# Altium PCB Cam_control.PcbDoc
Units mm, origin at the board's own origin, x right, y up, seen from the top; angles counter-clockwise.
Board outline 27 x 48 mm, 2 copper layers (Top Layer, Bottom Layer), stack 1.571 mm thick; 53 components, 45 nets, 197 pads, 35 vias.
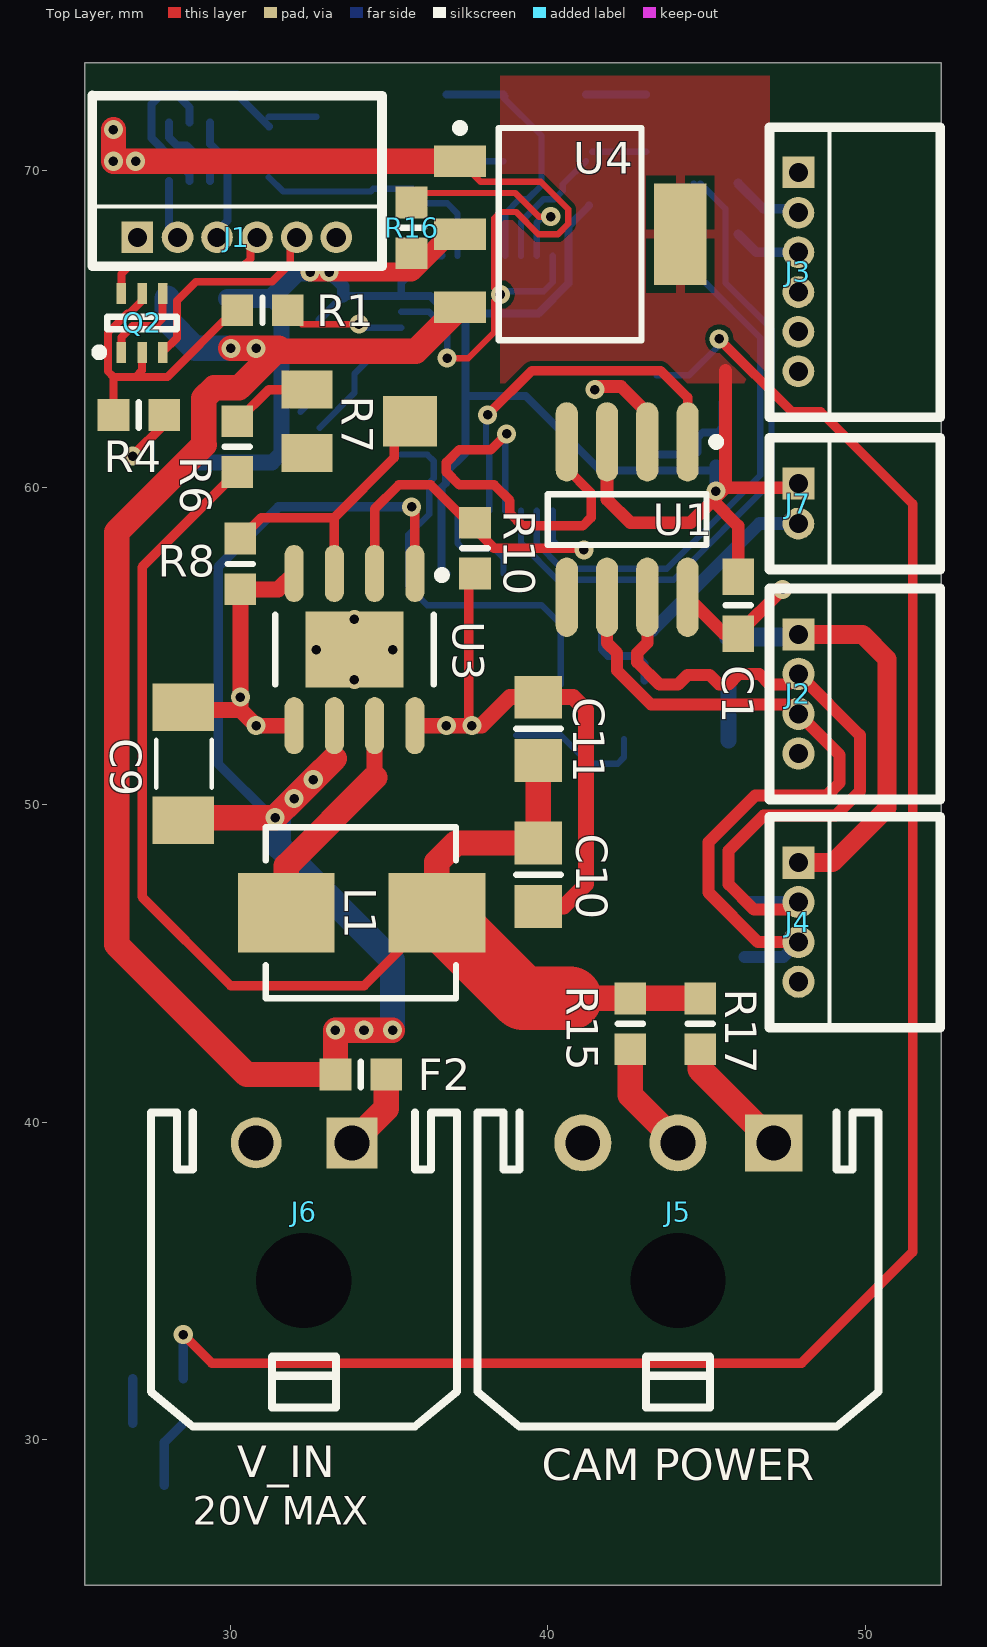
[diagram p0: Top Layer view]
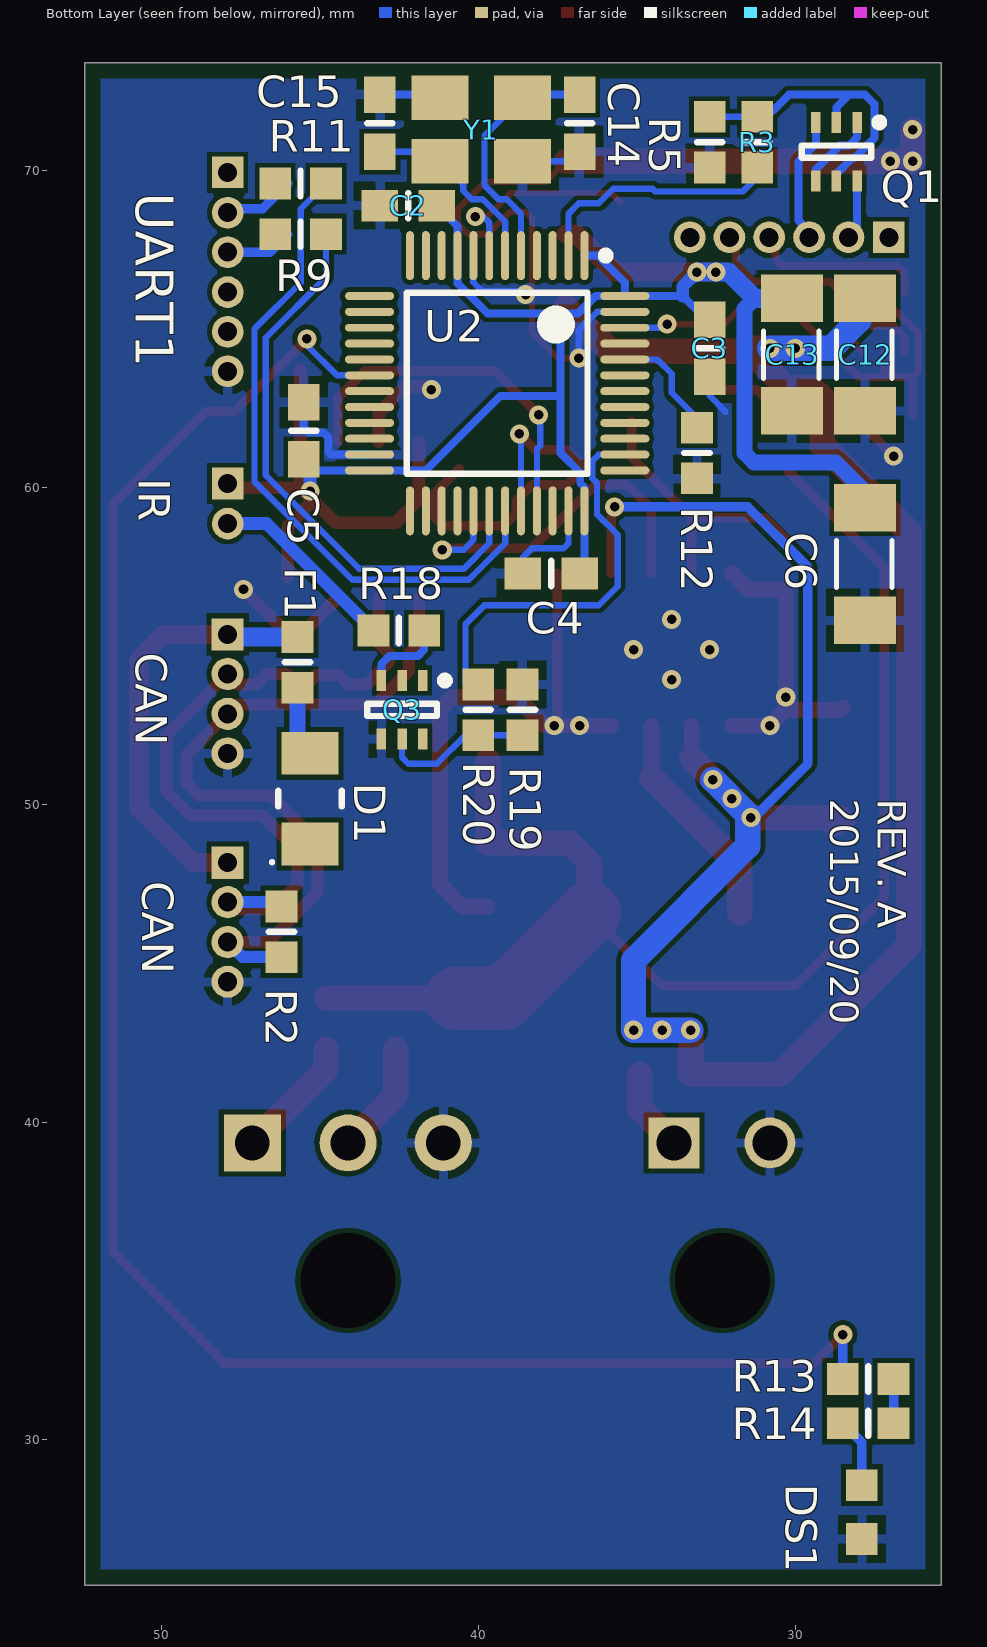
[diagram p1: Bottom Layer view, seen from below]
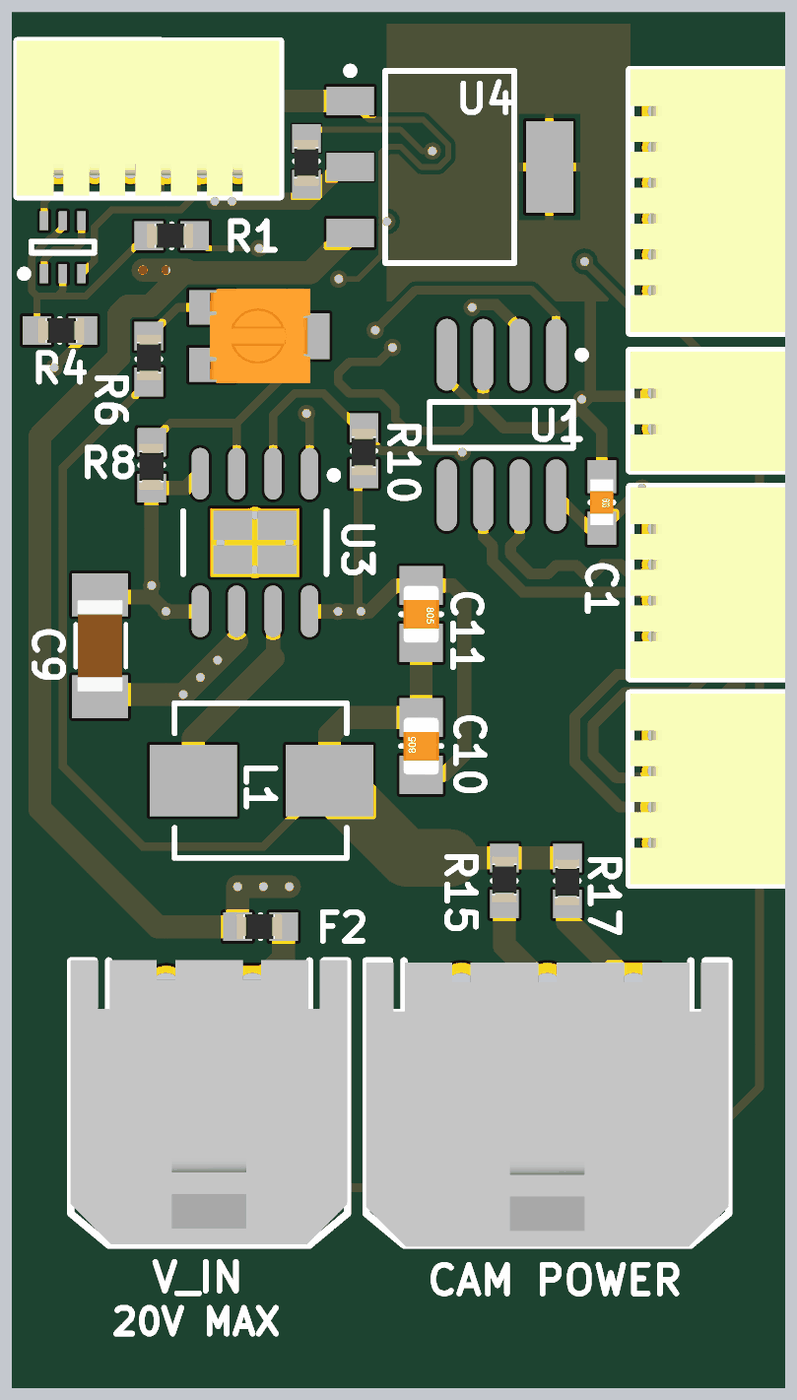
[diagram p2: 3D render of the assembled board from above, using the file's embedded part models]
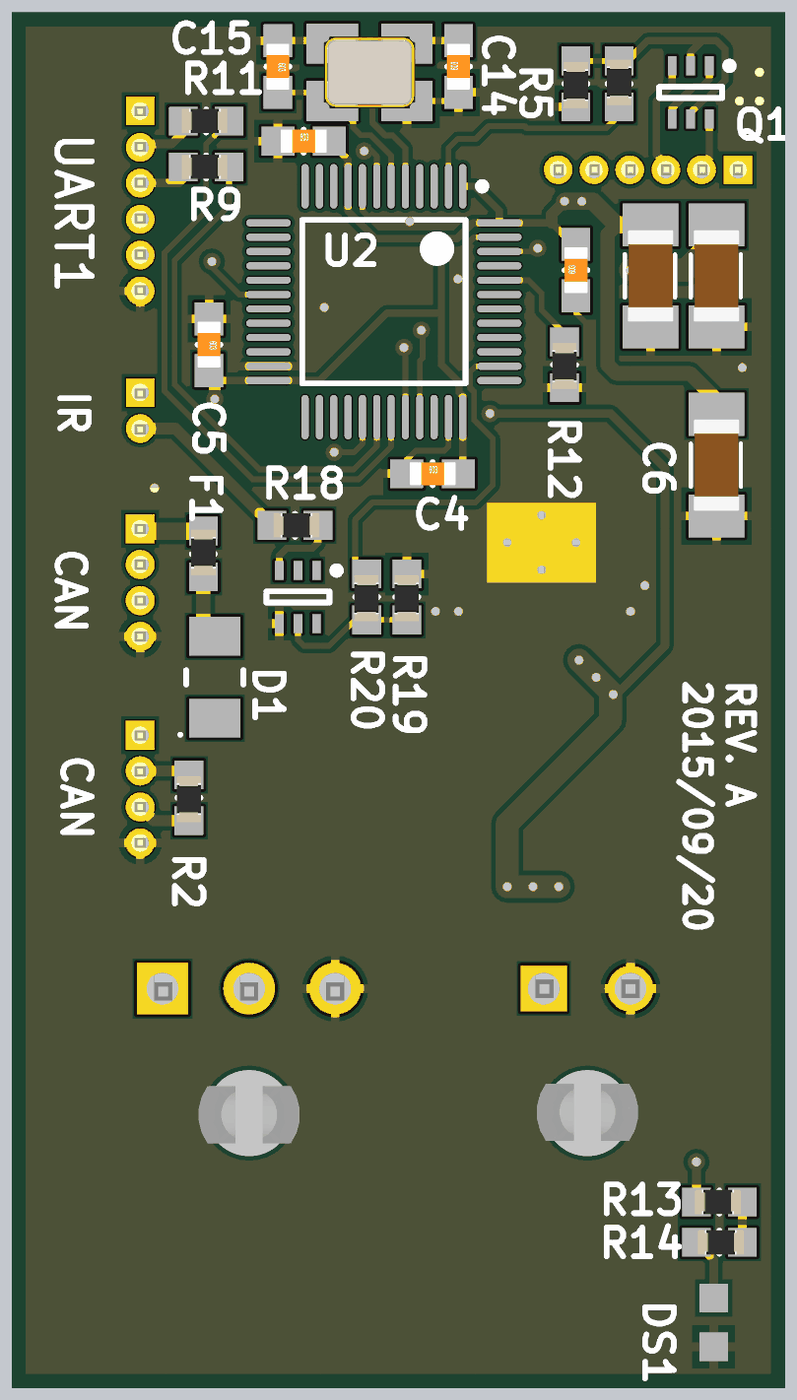
[diagram p3: 3D render of the assembled board from below, using the file's embedded part models]

## Layer stack, top to bottom
Top Solder: solder mask 0.0102, Solder Resist, Dk 3.5
Top Layer: signal copper 0.0356
Dielectric 1: dielectric 1.5, FR-4, Dk 4.8
Bottom Layer: signal copper 0.0356
Bottom Solder: solder mask 0.0102, Solder Resist, Dk 3.5

## Board outline
25.4,25.4 52.4,25.4 52.4,73.4 25.4,73.4

## Design rules (kind name [scope] priority, off if disabled: settings)
Clearance [All] p1: gap=0.152
DiffPairsRouting [All] p1: maxlimit=0.254 minlimit=0.152 mostfreqgap=0.254 toplayer_minwidth=0.2 toplayer_maxwidth=0.381 toplayer_prefwidth=0.2 bottomlayer_minwidth=0.2 bottomlayer_maxwidth=0.381 bottomlayer_prefwidth=0.2 maxuncoupledlength=12.7
HoleSize [All] p1: absolutevalues=TRUE maxlimit=6.35 minlimit=0.3 maxpercent=80.000 minpercent=20.000
HoleToHoleClearance [All] p1: gap=0.2 allowstackedmicrovias=TRUE
MinimumSolderMaskSliver [All] p1: minsoldermaskwidth=0.1
PolygonConnect PolygonConnect_Via [IsVia] p1: connectstyle=Direct reliefconductorwidth=0.254 reliefentries=4 polygonreliefangle="90 Angle" airgapwidth=0.254
PolygonConnect [All] p2: connectstyle=Relief reliefconductorwidth=0.3 reliefentries=4 polygonreliefangle="90 Angle" airgapwidth=0.25
RoomDefinition Cam_control [InComponentClass('Cam_control')] p1: confinementstyle=ConfineOut formatcopy=TRUE lockcomponents=FALSE outline 112.139,17.3 447.8,17.3 447.8,33.048 112.139,33.048
RoutingVias [All] p1: holewidth=0.3 width=0.8 viastyle="Through Hole" minholewidth=0.3 minwidth=0.6 maxholewidth=6.35 maxwidth=10
SilkToSilkClearance [All] p1: silktosilkclearance=0.05
SilkToSolderMaskClearance [IsPad] p1: minsilkscreentomaskgap=0.178 clearancetoexposedcopper=TRUE
SolderMaskExpansion [All] p1: expansion=0.102
Width [All] p1: maxlimit=10 minlimit=0.152 preferedwidth=0.2
24 further rules are at their usual default settings.

## Classes and differential pairs
differential pair CAN: +CAN_P -CAN_N
differential pair CAND: +CAND_P -CAND_N

## Components (designator, comment, footprint, x,y, rotation, side; value= is the part's Value field where it differs from the comment)
C1 "Capacitor" 0603_CAP 46,56.3 r270 top
C2 "Capacitor" 0603_CAP 42.2,68.9 r180 bottom
C3 "Capacitor" 0603_CAP 32.7,64.4 r90 bottom
C4 "Capacitor" 0603_CAP 37.7,57.3 r180 bottom
C5 "Capacitor" 0603_CAP 45.5,61.8 r270 bottom
C6 "Capacitor" 1206_CAP 27.8,57.6 r90 bottom
C9 "Capacitor" 1206_CAP 28.5,51.3 r270 top
C10 "Capacitor" 0805_CAP 39.7,47.8 r90 top
C11 "Capacitor" 0805_CAP 39.7,52.4 r270 top
C12 "Capacitor" 1206_CAP 27.8,64.2 r90 bottom
C13 "Capacitor" 1206_CAP 30.1,64.2 r90 bottom
C14 "Capacitor" 0603_CAP 36.8,71.5 r90 bottom
C15 "Capacitor" 0603_CAP 43.1,71.5 r270 bottom
D1 "MBR1020VL" SOD-123-2 45.3,50.2 r90 bottom
DS1 "APG1608SEKC/T" KING-LED0603-25-ORANGE_V 27.9,27.7 r90 bottom
F1 "Fuse" 0603_RES#1 45.7,54.5 r270 bottom
F2 "0603SFV350F/32-2" 0603_RES#1 34.1,41.5 r0 top
J1 "DF13-6P / 1.25mm Pitch Miniature Crimping Connector." DF13-6P-1.25DS 30.2,67.9 r180 top
J2 "DF13-4P / 1.25mm Pitch Miniature Crimping Connector." DF13-4P-1.25DS 47.9,53.5 r90 top
J3 "DF13-6P / 1.25mm Pitch Miniature Crimping Connector." DF13-6P-1.25DS 47.9,66.8 r90 top
J4 "DF13-4P / 1.25mm Pitch Miniature Crimping Connector." DF13-4P-1.25DS 47.9,46.3 r90 top
J5 "Molex - Micro-Fit 3.0 Series connector,  3.00mm (0.118\") pitch header, 3 positions." 43650-0300 44.1,35 r0 top
J6 "Micro-Fit 3.0, 3.00mm pitch header" 43650-0200 32.3,35 r0 top
J7 "DF13-2P / 1.25mm Pitch Miniature Crimping Connector." DF13-2P-1.25DS 47.9,59.5 r90 top
L1 "Inductor" ASPI0530 34.1,46.6 r0 top
Q1 "NTJD5121NT1G" ONSC-SC70-6-419B-02_V 28.7,70.6 r270 bottom
Q2 "NTJD5121NT1G" ONSC-SC70-6-419B-02_V 27.2,65.2 r90 top
Q3 "NTJD5121NT1G" ONSC-SC70-6-419B-02_V 42.4,53 r270 bottom
R1 "Resitor" 0603_RES#1 31,65.6 r0 top
R2 "Resitor" 0603_RES#1 46.2,46 r90 bottom
R3 "Resitor" 0603_RES#1 31.2,70.9 r270 bottom
R4 "Resitor" 0603_RES#1 27.1,62.3 r180 top
R5 "Resitor" 0603_RES#1 32.7,70.9 r90 bottom
R6 "Resitor" 0603_RES#1 30.2,61.3 r270 top
R7 "Potenciometer" TC33X-2 34.2,62.1 r270 top
R8 "Resitor" 0603_RES#1 30.3,57.6 r90 top
R9 "Resitor" 0603_RES#1 45.6,68 r180 bottom
R10 "Resitor" 0603_RES#1 37.7,58.1 r90 top
R11 "Resitor" 0603_RES#1 45.6,69.6 r180 bottom
R12 "Resitor" 0603_RES#1 33.1,61.1 r90 bottom
R13 "Resitor" 0603_RES#1 27.7,31.9 r180 bottom
R14 "Resitor" 0603_RES#1 27.7,30.5 r0 bottom
R15 "Resitor" 0603_RES#1 42.6,43.1 r270 top
R16 "Resitor" 0603_RES#2 35.7,68.2 r90 top
R17 "Resitor" 0603_RES#1 44.8,43.1 r90 top
R18 "Resitor" 0603_RES#1 42.5,55.5 r0 bottom
R19 "Resitor" 0603_RES#1 38.6,53 r90 bottom
R20 "Resitor" 0603_RES#1 40,53 r90 bottom
U1 "MAX3051" SOIC127P600X175-8M 42.5,59 r270 top
U2 "STM32F103CBT6" STM-LQFP48_L 39.4,63.3 r270 bottom
U3 "ST1S10PHR" HSO-8_L 33.9,54.9 r270 top
U4 "NCP1117ST33T3G" ONSC-SOT-223_M 40.7,68 r0 top
Y1 "TSX-3225 16.0000MF09Z-AC3" TSX-3225 39.9,71.3 r0 bottom

## Footprints (in the part's own frame and the unit in brackets; to place one, negate y for a bottom-side part, rotate by r counter-clockwise, add the part's x,y. Pads: shape width x height; smd on the part's side, far side on the other; paste and mask are expansions set on the pad)
0603_CAP [mm] "Chip Capacitor, 2-Leads, Body 1,60x0,80mm, IPC Low Density"
  rect 1.15x1 smd: 1(-0.9,0) 2(0.9,0)
  silkscreen extent 0,-0.4 0,0.4, body extent -0.8,-0.4 0.8,0.4, height 0.3
0603_RES#1 [mm] "Chip Resistor, 2-Leads, Body 1,57x0,85mm, IPC Medium Density"
  rect 1x1 smd: 1(-0.8,0) 2(0.8,0)
  silkscreen extent 0,-0.4 0,0.4, body extent -0.85,-0.42 0.75,0.43, height 0.45
0603_RES#2 [mm] "Chip Resistor, 2-Leads, Body 1,57x0,85mm, IPC Medium Density"
  rect 1x1 smd mask+0.05: 1(-0.8,0) 2(0.8,0)
  silkscreen extent 0,-0.4 0,0.4, body extent -0.85,-0.42 0.75,0.43, height 0.45
0805_CAP [mm] "Chip Capacitor, 2-Leads, Body 2,00x1,25mm, IPC Low Density"
  rect 1.35x1.5 smd: 1(-1,0) 2(1,0)
  silkscreen extent 0,-0.7 0,0.7, body extent -1,-0.62 1,0.63, height 0.78
1206_CAP [mm] "Chip Capacitor, 2-Leads, Body 3,20x1,60mm, IPC Low Density"
  rect 1.5x1.95 smd: 1(-1.775,0) 2(1.775,0)
  silkscreen extent -0.75,-0.85 0.75,0.9, body extent -1.6,-0.8 1.6,0.8, height 1.6
43650-0200 [mm]
  round 0 hole 3 unplated: 0(0,0)
  rect 1.6x1.6 hole 1.1: 1(1.524,4.343)
  round 1.6 hole 1.1: 2(-1.5,4.343)
  silkscreen extent -4.82,-4.6 4.83,5.31, body extent -4.82,-4.57 4.83,5.33, height 5.64
43650-0300 [mm]
  round 0 hole 3 unplated: 0(0,0)
  rect 1.8x1.8 hole 1.1: 1(3.023,4.343)
  round 1.8 hole 1.1: 2(0,4.343) 3(-3,4.343)
  silkscreen extent -6.32,-4.6 6.32,5.31, body extent -6.32,-4.66 6.32,5.24, height 5.73
ASPI0530 [mm] "Precision Wire Wound Inductor, 2-Leads, Body 5,60x5,20mm, IPC Low Density"
  rect 3.05x2.5 smd: 1(-2.35,0) 2(2.4,0)
  silkscreen extent -3,-2.7 3,2.7, body extent -2.98,-2.7 2.97,2.7, height 3
DF13-2P-1.25DS [mm]
  rect 1x1 hole 0.6 mask+0.05: 1(0.635,0)
  round 1 hole 0.6 mask+0.05: 2(-0.625,0)
  silkscreen extent -2.07,-4.47 2.11,0.91, body extent -2.1,-4.5 2.05,0.9, height 3.63
DF13-4P-1.25DS [mil]
  rect 40x40 hole 23.62 mask+1.97: 1(74,0)
  round 40 hole 23.62 mask+1.97: 2(25,0) 3(-24.61,0) 4(-73.82,0)
  silkscreen extent -131,-176 132,36, body extent -131,-177 131,35, height 145
DF13-6P-1.25DS [mm]
  rect 1x1 hole 0.6 mask+0.05: 1(3.15,0)
  round 1 hole 0.6 mask+0.05: 2(1.88,0) 3(0.635,0) 4(-0.625,0) 5(-1.875,0) 6(-3.125,0)
  silkscreen extent -4.57,-4.47 4.6,0.91, body extent -4.55,-4.5 4.6,0.9, height 3.68
HSO-8_L [mm] "SOIC, 8-Leads, Body 4.9x3.9mm, Pitch 1.27mm, Thermal Pad, IPC High Density"
  oval 1.8x0.6 smd mask+0.1: 1(-2.4,1.905) 2(-2.4,0.635) 3(-2.4,-0.635) 4(-2.4,-1.905) 5(2.4,-1.905) 6(2.4,-0.635) 7(2.4,0.635) 8(2.4,1.905)
  rect 2.4x3.1 smd paste-1.2 mask+0.1: 9(0,0)
  silkscreen extent -2.47,-2.5 1.1,2.88, body extent -2,-2.5 2,2.5, height 1.75
KING-LED0603-25-ORANGE_V [mm] "LED, SMT, Body 1.6 x 0.8 mm, 0.25mm Thickness"
  rect 1x1 smd paste+0 mask+0: 1(0.85,0) 2(-0.85,0)
  body extent -0.8,-0.4 0.8,0.4, height 0.25
ONSC-SC70-6-419B-02_V [mm] "SOT23, 6-Leads, Body 2x1.25mm, Pitch 0.65mm"
  rect 0.66x0.3 smd: 1(-0.925,0.65) 2(-0.925,0) 3(-0.925,-0.65) 4(0.925,-0.65) 5(0.925,0) 6(0.925,0.65)
  silkscreen extent -1.05,-1.1 0.2,1.47, body extent -0.63,-1 0.63,1, height 1.1
ONSC-SOT-223_M [mm] "SOT223, 4-Leads, Body 3.7x6.7mm, Pitch 2.3mm, IPC Low Density"
  rect 1.65x1 smd: 1(-3.475,2.3) 3(-3.475,-2.3)
  rect 1.65x1 smd mask+0.05: 2(-3.475,0)
  rect 1.65x3.2 smd: 4(3.475,0)
  silkscreen extent -3.6,-3.35 2.25,3.47, body extent -1.85,-3.35 1.85,3.35, height 1.8
SOD-123-2 [mm] "Molded Diode, 2-Leads, Body 2,75x1,72mm, IPC Medium Density"
  rect 1.35x1.8 smd: 1(-1.43,0) 2(1.43,0)
  silkscreen extent -2.05,-1 0.25,1.25, body extent -1.5,-0.97 1.5,0.98, height 1.08
SOIC127P600X175-8M [mm] "SOIC, 8-Leads, Body 4,90x3,90mm, Pitch 1,27mm, IPC Low Density"
  oval 2.5x0.7 smd: 1(-2.45,1.905) 2(-2.45,0.635) 3(-2.45,-0.635) 4(-2.45,-1.905) 5(2.45,-1.905) 6(2.45,-0.635) 7(2.45,0.635) 8(2.45,1.905)
  silkscreen extent -2.57,-2.5 0.8,2.93, body extent -2,-2.5 2,2.5, height 1.75
STM-LQFP48_L [mm] "QFP, 48-Leads, Body 7x7mm, Pitch 0.5mm, IPC High Density"
  oval 1.55x0.25 smd mask+0.05: 1(-4.025,2.75) 2(-4.025,2.25) 3(-4.025,1.75) 4(-4.025,1.25) 5(-4.025,0.75) 6(-4.025,0.25) 7(-4.025,-0.25) 8(-4.025,-0.75) 9(-4.025,-1.25) 10(-4.025,-1.75) 11(-4.025,-2.25) 12(-4.025,-2.75) 25(4.025,-2.75) 26(4.025,-2.25) 27(4.025,-1.75) 28(4.025,-1.25) 29(4.025,-0.75) 30(4.025,-0.25) 31(4.025,0.25) 32(4.025,0.75) 33(4.025,1.25) 34(4.025,1.75) 35(4.025,2.25) 36(4.025,2.75)
  oval 0.25x1.55 smd mask+0.05: 13(-2.75,-4.025) 14(-2.25,-4.025) 15(-1.75,-4.025) 16(-1.25,-4.025) 17(-0.75,-4.025) 18(-0.25,-4.025) 19(0.25,-4.025) 20(0.75,-4.025) 21(1.25,-4.025) 22(1.75,-4.025) 23(2.25,-4.025) 24(2.75,-4.025) 37(2.75,4.025) 38(2.25,4.025) 39(1.75,4.025) 40(1.25,4.025) 41(0.75,4.025) 42(0.25,4.025) 43(-0.25,4.025) 44(-0.75,4.025) 45(-1.25,4.025) 46(-1.75,4.025) 47(-2.25,4.025) 48(-2.75,4.025)
  silkscreen extent -4.15,-2.85 2.85,3.55, body extent -3.5,-3.5 3.5,3.5, height 1.6
TC33X-2 [mm]
  rect 1.2x1.6 smd: 1(-1,-1.8) 3(1,-1.8)
  rect 1.6x1.7 smd: 2(0,1.45)
  body extent -1.65,-1.88 1.65,1.63, height 2.1
TSX-3225 [mm]
  rect 1.8x1.4 smd: 1(-1.3,-1) 2(1.3,-1) 3(1.3,1) 4(-1.3,1)
  body extent -1.6,-1.25 1.6,1.25, height 0.6

## Part data
D1: library part Diode
DS1: library part CMP-0239-00002-1, "LED, SMT, 0603(1608), 0.25mm Tthickness, Super Bright Orange"
F2: library part Fuse
J1 J3: library part DF13-6P-1.25DS
J2 J4: library part DF13-4P-1.25DS
J5: library part HEADER_POS3_?43650-0300
J6: library part HEADER_POS2_?43650-0200
J7: library part DF13-2P-1.25DS
Q1 Q2 Q3: library part CMP-1058-00623-1, "Power MOSFET, 60 V, 295 mA, Dual N-Channel with ESD Protection, 6-Pin SC70, Pb-Free, Tape and Reel"
U2: library part CMP-0237-00250-3, "ARM Cortex-M3 32-bit MCU, 128 KB Flash, 20 KB Internal RAM, 37 I/Os, 48-pin LQFP, -40 to 85 degC, Tray"
U3: library part CMP-0240-00113-1, "Monolithic synchronous step-down regulator, 8-Pin HSOP, Tape and Reel"
U4: library part CMP-0592-00001-1, "1.0 A Low-Dropout Positive Fixed Voltage Regulator, 5 V Vout, 0 to 125 degC, 4-Pin SOT-223, Pb-Free, Tape and Reel"

## Via types
v1: diameter 0.6, hole 0.3, Top Layer to Bottom Layer, tented both sides, 35 vias

## Nets (pads, with @x,y where several pads share a name; then routed paths per layer and width w, separated by ;. In a path a pad name is that pad's centre, name@x,y a point inside that pad or via, vN(x,y) a via of type N, cw(c..) or ccw(c..) an arc to the next point about the centre after c; other vN are vias at no path point)
3.3V: C1.1 C2.2 C3.2 C4.2 C5.2 C6.2 C13.2 J7.1 R16.1 U1.3 U2.1 U2.9 U2.24 U2.36 U2.48 U4.2 U4.4 | length 66.7
  Top Layer w0.4: U1.3 41.865,59.635 42.6,58.9 44.5,58.9 45.2,59.6 ; 45.6,63.7 45.6,60 ; C1.1 46,58.8 45.2,59.6 ; J7.1 47.765,60 45.6,60 ; 45.2,59.6 45.6,60
  Top Layer w0.6: v1(32.5,66.8) v1(33.1,66.8) 35.7,66.8 36.9,68 U4.2
  Bottom Layer w0.25: C3.2@32.8,65.3 33.55,66.05 U2.48 ; U2.1 36.225,67.325 35.375,66.475 U2.48 ; C4.2 36.65,57.45 U2.36 36.65,60.016 36.78,60.146 36.78,60.48 37.4,61.1 37.4,62.9 ; C2.2 40.65,68.25 U2.9 40.65,66.45 39.7,65.5 37.4,65.5 ; C5.2@45.3,60.7 45.15,60.55 U2.24 41.65,60.55 39.3,62.9 37.4,62.9 ; U2.48 36.3,66.05 36.85,65.5 37.4,65.5 ; 37.4,62.9 37.4,65.5
  Bottom Layer w0.4: v1(33.1,66.8) 33.55,66.35 33.55,66.05 ; v1(45.3,59.9) C5.2@45.3,60.7
  Bottom Layer w0.5: C6.2@27.3,59.375 28.725,60.8 31.3,60.8 31.6,61.1 31.6,64.065 31.602,64.068 31.602,64.732 31.6,64.735 31.6,65.65 31.275,65.975
  Bottom Layer w0.6: C13.2@29.9,65.975 31.275,65.975 32.1,66.8 v1(32.5,66.8) v1(33.1,66.8) v1@33.1,66.788
5V: D1.1
CAM_4V: J5.2 R15.2 | length 3.6
  Top Layer w0.8: R15.2 42.6,40.843 J5.2
CAM_10V: J5.1 R17.1 | length 3.9
  Top Layer w0.8: R17.1 44.8,41.666 J5.1
CAM_POWER_BUT_1: J1.2 Q1.6 | length 1.8
  Bottom Layer w0.25: Q1.6 28.05,67.97 J1.2@28.12,67.9
CAM_POWER_BUT_2: J1.3 Q1.3 | length 4.1
  Bottom Layer w0.25: Q1.3 29.35,70.85 29.9,70.3 29.9,68.435 J1.3@29.365,67.9
CAM_POWER_BUT_CTRL: R3.2 U2.2 | length 7.8
  Bottom Layer w0.2: R3.2@31.2,69.8 31.652,69.348 34.416,69.348 34.495,69.427 35.741,69.427 36.195,68.973 36.827,68.973 37.15,68.65 U2.2
CAM_TRIG_1: J1.4 Q2.6 | length 5.6
  Top Layer w0.25: Q2.6 26.55,66.75 26.8,67 30.4,67 30.625,67.225 J1.4@30.625,67.9
CAM_TRIG_2: J1.5 Q2.3 | length 6.7
  Top Layer w0.25: Q2.3 28.3,64.725 28.3,65.9 28.9,66.5 31.3,66.5 31.875,67.075 J1.5@31.875,67.9
CAM_TRIG_CRL: R1.2 U2.46 | length 3.8
  Top Layer w0.2: R1.2 32.237,65.163 v1(34.037,65.163)
  Bottom Layer w0.2: v1(34.037,65.163) 34.15,65.05 U2.46
CAN_N: J2.3 J4.3 R2.1 U1.6 | length 23.3
  Top Layer w0.381: U1.6 41.865,55.109 42.182,54.792 42.182,54.237 43.254,53.165 47.61,53.165 J2.3 49.2,51.575 49.2,50.7 48.8,50.3 46.537,50.3 45.065,48.828 45.065,47.237 46.627,45.675 J4.3
  Bottom Layer w0.381: R2.1 47.425,45.2 J4.3
CAN_P: J2.2 J4.2 R2.2 U1.7 | length 22.9
  Top Layer w0.381: U1.7 43.135,55.109 42.817,54.792 42.817,54.5 43.518,53.8 44.1,53.8 44.4,54.1 45.1,54.1 45.4,53.8 45.7,53.8 46.035,54.135 46.665,54.135 47,53.8 47.565,53.8 J2.2 49.835,52.2 49.835,50.437 49.063,49.665 46.8,49.665 45.7,48.565 45.7,47.5 46.5,46.7 47.665,46.7 J4.2
  Bottom Layer w0.381: R2.2@46.335,46.935 J4.2
CAND_N: U1.4 U2.32 | length 12.5
  Top Layer w0.3: v1(38.7,61.7) 38.2,61.2 37.2,61.2 36.8,60.8 36.8,60.5 37.2,60.1 38.3,60.1 38.8,59.6 38.8,59.2 39.2,58.8 41.1,58.8 41.363,59.063 41.363,59.837 U1.4@40.595,60.605
  Bottom Layer w0.2: U2.32 38.65,61.65 v1(38.7,61.7)
CAND_P: U1.1 U2.33 | length 11.7
  Top Layer w0.3: v1(38.096,62.304) 39.492,63.7 43.555,63.7 44.405,62.85 U1.1
  Bottom Layer w0.2: v1(38.096,62.304) 38.046,62.254 38.046,61.329 38.146,61.229 U2.33@38.146,59.275
GND: C1.2 C2.1 C3.1 C4.1 C5.1 C6.1 C9.1 C10.1 C11.1 C12.1 C13.1 C14.1 C15.1 DS1.2 J2.4 J3.6 J4.4 J5.3 J6.2 Q3.4 R4.1 R5.1 R8.1 R10.1 R12.1 R19.2 U1.2 U1.8 U2.8 U2.23 U2.35 U2.47 U3.4 U3.5 U3.8 U3.9 U4.1 Y1.2 Y1.4 | length 77.6
  Top Layer w0.2: v1(36.823,64.092) 37.492,64.092 38.302,64.902 38.302,65.898 v1(38.502,66.098) 38.302,66.298 38.302,68.502 38.5,68.7 39,68.7 39.7,68 40.318,68 40.641,68.324 40.641,68.781 39.77,69.652 37.873,69.652 U4.1
  Top Layer w0.3: v1(26.9,61) 27.9,62 R4.1 ; v1@37.5,52.5 R10.1@37.5,57.3
  Top Layer w0.4: v1(41.478,63.098) 41.578,63.198 42.302,63.198 43.135,62.365 U1.2 ; U1.8 45.555,55.4 C1.2 v1(47.4,56.8)
  Top Layer w0.5: C9.1 28.575,53 30.3,53 ; U3.5 v1(30.8,52.5) 30.3,53 ; U3.4 31.495,56.8 R8.1 30.3,53 ; U3.8 37.1,52.5 37.5,52.5 37.9,52.5 38.8,53.4 C11.1 40.8,53.4 41.2,53 41.2,47.5 40.5,46.8 C10.1
  Top Layer w0.8: v1(26.3,71.3) v1(26.3,70.3) U4.1
  Bottom Layer w0.2: 32.2,62.4 32.7,62.9 C3.1 ; U2.47 36.25,65.55 36.823,64.977 v1(36.823,64.092) ; C14.1@37.1,70.3 Y1.4 ; U2.35 37.15,58.25 37.3,58.1 38.3,58.1 38.6,57.8 C4.1 ; v1(38.502,66.098) 38.605,66.2 39.866,66.2 40.15,66.484 U2.8
  Bottom Layer w0.25: Y1.2@41.2,72.4 C15.1 ; U2.23 44.65,61.05 44.723,61.123 44.723,61.59 44.885,61.752 45.352,61.752 45.5,61.9 C5.1
  other v1: 36.8,52.5 37.6,52.5 30.3,53.4 33.9,53.95 32.7,54.9 35.1,54.9 33.9,55.85 27,70.3
IR_LED_CONTROL: R20.2 U2.38 | length 12.6
  Bottom Layer w0.2: U2.38 36.2,61.05 36.402,60.848 36.402,60.302 36.252,60.152 36.252,59.171 35.6,58.519 35.6,56.9 36.2,56.3 39.8,56.3 40.4,55.7 R20.2@40.4,53.8
NetC14_2: C14.2 U2.5 Y1.1 | length 8
  Bottom Layer w0.2: Y1.1 39.8,71.1 39.8,69.543 39.357,69.1 39.102,69.1 38.65,68.648 U2.5 ; Y1.1@38.6,72.4 Y1.1@38.65,72.35
  Bottom Layer w0.25: C14.2 Y1.1@38.6,72.4
NetC15_2: C15.2 U2.6 Y1.3 | length 5.7
  Bottom Layer w0.2: U2.6 39.15,68.395 39.86,69.105 40.205,69.105 40.473,69.373 40.473,69.573 Y1.3 ; Y1.3@41.4,70.6 C15.2
NetD1_2: D1.2 F1.2 | length 1.7
  Bottom Layer w0.5: D1.2@45.7,52.03 F1.2
NetDS1_1: DS1.1 R14.2 | length 2.2
  Bottom Layer w0.3: DS1.1 27.9,29.9 R14.2
NetF1_1: F1.1 J2.1 J4.1 | length 13.6
  Top Layer w0.6: J4.1 48.98,48.18 50.7,49.9 50.7,54.6 49.92,55.38 J2.1
  Bottom Layer w0.6: F1.1 47.82,55.3 J2.1
NetF2_2: F2.2 J6.1 | length 2.6
  Top Layer w0.8: J6.1 34.9,40.419 F2.2
NetJ7_2: J7.2 R18.2 | length 6
  Bottom Layer w0.4: R18.2 46.675,58.875 J7.2
NetL1_1: L1.1 U3.7 | length 7.1
  Top Layer w0.5: 34.535,50.865 U3.7
  Top Layer w0.8: L1.1 31.75,48.08 34.535,50.865
NetQ1_1: Q1.1 Q1.4 | length 2.6
  Bottom Layer w0.25: Q1.1 28.05,71.05 28.3,70.8 28.6,70.8 29.35,70.05 Q1.4
NetQ1_2: Q1.2 Q1.5 R3.1 R5.2 | length 9.7
  Bottom Layer w0.2: R3.1 R5.2
  Bottom Layer w0.25: Q1.5 28.7,69.898 28.2,70.398 28.133,70.398 27.5,71.031 27.5,72.1 27.8,72.4 28.3,72.4 ; Q1.2 28.7,72 28.3,72.4 ; R3.1@31.2,71.4 30.2,72.4 28.3,72.4
NetQ2_1: Q2.1 Q2.4 | length 2.8
  Top Layer w0.25: Q2.1 26.55,64.75 26.9,65.1 27.6,65.1 27.85,65.35 Q2.4
NetQ2_2: Q2.2 Q2.5 R1.1 R4.2 | length 10
  Top Layer w0.25: R4.2 26.3,63.5 ; Q2.2 27.2,63.7 27,63.5 ; Q2.5 27.2,65.902 26.8,65.502 26.733,65.502 26.123,64.892 26.123,63.677 26.3,63.5 ; R1.1 30.1,65.6 28,63.5 27,63.5 ; 26.3,63.5 27,63.5
NetQ3_3: Q3.3 R18.1 | length 2.7
  Bottom Layer w0.25: R18.1 41.7,54.9 41.9,54.7 42.8,54.7 43.05,54.45 Q3.3
NetQ3_5: Q3.5 R19.1 R20.1 | length 4.4
  Bottom Layer w0.2: R19.1@39,52.2 40.4,52.2 41.3,51.3 42.2,51.3 42.4,51.5 Q3.5
NetR6_1: R6.1 R7.1 | length 2.6
  Top Layer w0.3: R6.1 31.2,63.1 R7.1
NetR7_2: R7.2 R8.2 U3.3 | length 8.8
  Top Layer w0.3: R8.2 30.965,59.065 33.265,59.065 ; U3.3 33.265,59.065 ; R7.2@35.15,62.1 35.15,60.95 33.265,59.065
NetR9_2: R9.2 U2.30 | length 18
  Bottom Layer w0.2: U2.30 39.65,58.248 40.446,57.452 43.752,57.452 46.7,60.4 46.7,64.734 44.8,66.634 R9.2
NetR11_2: R11.2 U2.31 | length 21.2
  Bottom Layer w0.2: U2.31 39.15,58.25 40.3,57.1 43.965,57.1 47.052,60.188 47.052,65.012 45.598,66.467 45.598,68.802 R11.2 ; R11.2@44.6,69.6 44.6,69.521 R11.2@44.66,69.46
NetR12_2: R12.2 U2.44 | length 3.8
  Bottom Layer w0.2: R12.2@32.8,61.9 33.9,63 33.9,63.6 34.35,64.05 U2.44
NetR13_2: R13.2 R14.1 | length 1.4
  Bottom Layer w0.3: R14.1 R13.2
NetR16_2: R16.2 U2.7 | length 6.6
  Top Layer w0.2: R16.2@35.5,69 35.8,69.3 38.972,69.3 39.719,68.552 v1(40.089,68.552)
  Bottom Layer w0.2: U2.7 39.65,68.369 39.834,68.552 v1(40.089,68.552)
STATUS_LED: R13.1 U2.18 | length 60.6
  Top Layer w0.3: v1(28.5,33.3) 29.4,32.4 48,32.4 51.5,35.9 51.5,59.5 48.6,62.4 47.7,62.4 v1(45.4,64.7)
  Bottom Layer w0.2: U2.18 44.45,63.55 45.4,64.5 v1(45.4,64.7)
  Bottom Layer w0.3: R13.1 v1(28.5,33.3)
SWCLK: U2.37
SWDIO: U2.34
USART1_RX: J3.2 R11.1 | length 2.4
  Bottom Layer w0.3: R11.1@46,69.6 46.798,68.802 47.9,68.802 J3.2
USART1_TX: J3.3 R9.1 | length 2.1
  Bottom Layer w0.3: R9.1@46,68 46.565,67.435 J3.3
V_IN: C9.2 C12.2 F2.1 U3.1 U3.6 U4.3 | length 80.9
  Top Layer w0.3: v1(35.7,59.4) 35.805,59.295 U3.1
  Top Layer w0.5: 33.265,51.465 U3.6
  Top Layer w0.8: C9.2 28.575,49.6 28.775,49.4 28.975,49.6 v1(31.4,49.6) v1(32,50.2) v1(32.6,50.8) 33.265,51.465 ; v1(30,64.4) v1(30.8,64.4) 31.507,64.4 ; F2.1 30.5,41.5 26.4,45.6 26.4,58.6 29.159,61.359 29.148,61.371 29.148,62.829 29.471,63.152 30.259,63.152 31.507,64.4 ; F2.1@33.3,41.6 v1(33.3,42.9) v1(34.2,42.9) v1(35.1,42.9) ; U4.3 35.835,64.31 31.597,64.31 31.507,64.4
  Bottom Layer w0.3: v1(31.4,49.6) 31.3,49.6 29.6,51.3 29.6,57.5 31.5,59.4 v1(35.7,59.4)
  Bottom Layer w0.8: C12.2@28,65.975 28,65.275 28.875,64.4 v1(30,64.4) v1(30.8,64.4) ; v1(32.6,50.8) 31.5,49.7 31.5,48.7 35.1,45.1 v1(35.1,42.9) v1(34.2,42.9) v1(33.3,42.9)
VCC_CAM: C10.2 C11.2 L1.2 R6.2 R15.1 R17.2 | length 43.1
  Top Layer w0.3: R6.2 27.2,57.5 27.2,47.1 30,44.3 34.2,44.3 L1.2
  Top Layer w0.8: L1.2 36.5,48.2 37.1,48.8 C10.2 C11.2 ; 40.7,43.9 R15.1 R17.2
  Top Layer w2: L1.2 39.2,43.9 40.7,43.9
VCC_CAM_EN: R10.2 U2.29 U3.2 | length 11.8
  Top Layer w0.3: U3.2 34.535,59.335 35.3,60.1 36.3,60.1 37.5,58.9 38.298,58.102 41.077,58.102 v1(41.132,58.048)
  Bottom Layer w0.2: U2.29 40.15,58.35 40.452,58.048 v1(41.132,58.048)
pads on no net: J1.1 J1.6 J3.1 J3.4 J3.5 J5.0 J6.0 Q3.1 Q3.2 Q3.6 R7.3 U1.5 U2.3 U2.4 U2.10 U2.11 U2.12 U2.13 U2.14 U2.15 U2.16 U2.17 U2.19 U2.20 U2.21 U2.22 U2.25 U2.26 U2.27 U2.28 U2.39 U2.40 U2.41 U2.42 U2.43 U2.45

## Polygon pours and split planes (outlines as drawn)
3.3V on Top Layer "Top Layer-No Net" (solid, remove dead copper, pour order 4): 38.5,73 38.5,63.3 47,63.3 47,73
GND on Bottom Layer "Top Layer-No Net" (solid, remove dead copper, pour order 3): 25.9,25.9 25.9,72.9 51.9,72.9 51.9,25.9

## Silkscreen, mask and mechanical layers (free items; w line width, h text height)
Top Overlay:
  text "V_IN" at 30.2,28.8 h1
  text "CAM POWER" at 39.8,28.7 h1
  text "20V MAX" at 28.8,27.3 h0.9
Bottom Overlay:
  text "UART1" at 50.8,69.3 h1.2 r90
  text "IR" at 50.7,60.3 h1 r90
  text "CAN" at 50.8,54.8 h1 r90
  text "REV. A" at 27.4,50.2 h0.9 r90
  text "2015/09/20" at 28.9,50.2 h0.9 r90
  text "CAN" at 50.6,47.6 h1 r90
Bottom Solder:
  rectangle: 32,53.5 35.8,56.3
Mechanical 1:
  the board outline again, w0.254